# EAGLE board power_layout (EAGLE 9.6.2)
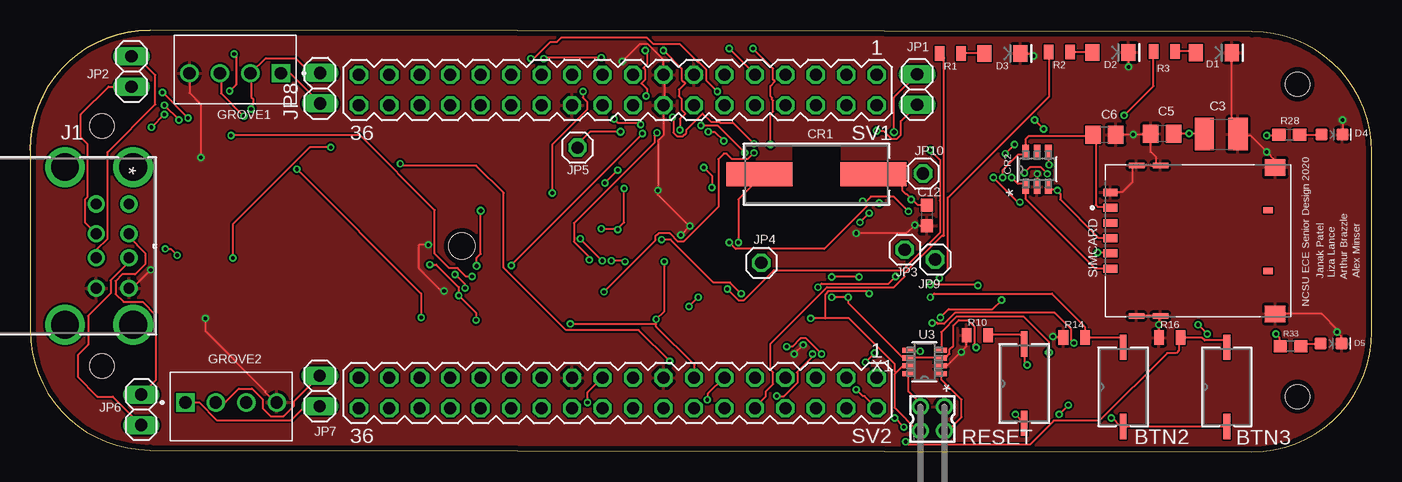
[diagram p0: board, top side]
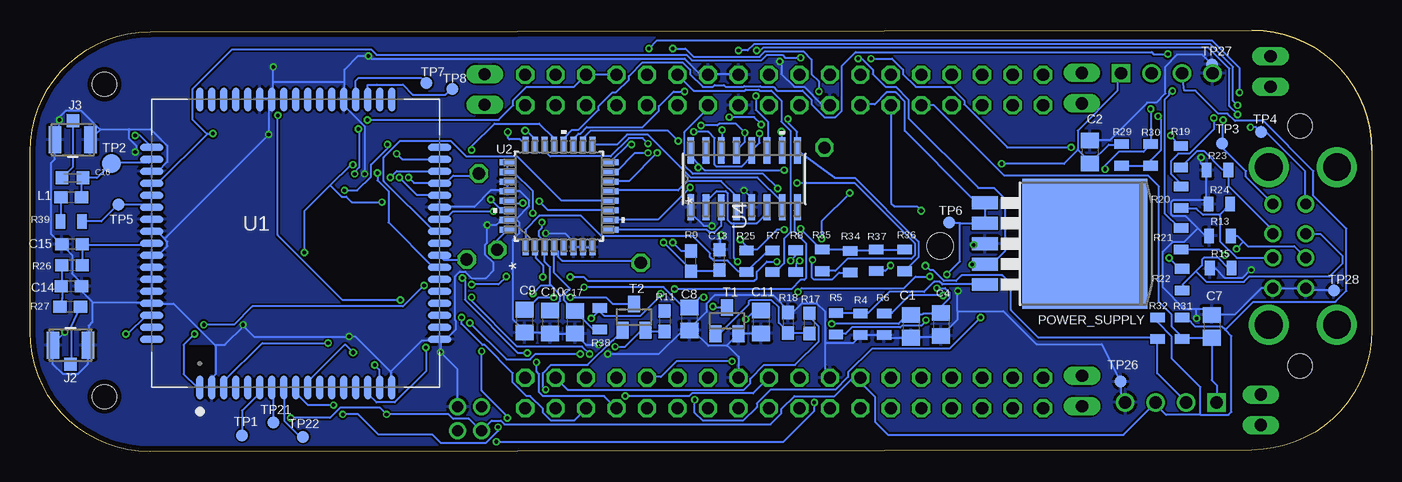
[diagram p1: board, bottom side, seen from below]

Size 111.87 x 35.15 mm. Coordinates in mm from the lower left corner, seen from the top.
Outline: 0,25.15 arc-90 10,35.15
Outline: 0,25.15 0,10.15 arc90 10,0.15 101.87,0 arc90 111.87,10 111.87,25 arc90 101.87,35 10,35.15
Outline: 10,35.15 arc90 0,25.15
Copper layers (1*16): Top 0.035mm / dielectric 1.5mm / Bottom 0.035mm
Design rules "NOA Eagle Rule 2016-06-12": minimum track width 6mil, minimum drill 0.3mm, track to track 6mil, track to pad 6mil, pad to pad 6mil, via to via 6mil, smd to smd 0mil, copper to edge 0.4mm, drill to drill 10mil, minimum pad ring 10mil, minimum via ring 6mil, stop-mask expansion 2mil, vias tented up to drill 25mil, thermal gap 10mil
Net classes: 0 default: width 0.152 mm, drill 0.152 mm, clearance 0.152 mm; 1 POWER: width 0.152 mm, drill 0.152 mm, clearance 0.152 mm
Holes 2 mm at 105.66,4.6 105.66,30.63 6,27.15 6,7.15
Holes 2.2 mm at 36,17.15

## Footprints (pad centres in the part's own frame; a part is rotated, then mirrored left to right if it is on the bottom)
SW2_PTS636_SM25F_SMTR_LFS_CNK = smd 2.108 x 0.559: 1 -3.301,0; 2 3.301,0
C0805 = smd 1.3 x 1.5: 1 -0.95,0; 2 0.95,0
C1210 = smd 1.6 x 2.7: 1 -1.4,0; 2 1.4,0
C0603 = smd 1.1 x 1: 1 -0.85,0; 2 0.85,0
C0603K = smd 1.05 x 1.08: 1 -0.875,0; 2 0.875,0
CRYSTAL_TXC_9C_TXC = smd 5.512 x 2.007: 1 -4.75,0; 2 4.75,0
SOT23-6L_STM-M = smd 1.181 x 0.559: 1 -1.467,0.95; 2 -1.467,0; 3 -1.467,-0.95; 4 1.467,-0.95; 5 1.467,0; 6 1.467,0.95
LED-1206 = smd 1.2 x 1.4: A -1.5,0; C 1.5,0
LED-0603 = smd 1 x 1: A -0.877,0; C 0.877,0
TE_640456-4 = drill 1.02 pad 1.37 square: 1 0,0 | drill 1.02 pad 1.37: 2 -2.54,0; 3 -5.08,0; 4 -7.62,0
CONN_AU-Y1008-2_ASM = drill 0.914 pad 1.422: 1 0,0; 2 2.489,0; 3 4.496,0; 4 7.01,0; 5 0,-2.718; 6 2.489,-2.718; 7 4.496,-2.718; 8 7.01,-2.718 | drill 2.311 pad 2.311: 9 -3.073,-5.334; 10 10.058,-5.334; 11 -3.073,0.356; 12 10.058,0.356
CONN_-SMT-1(01) = smd 1.041 x 2.261: 1 -1.47,0; 2 1.47,0 | smd 1.041 x 1.092: 3 0,-1.596
1X02 = drill 1.016 long: 1 -1.27,0; 2 1.27,0
1X01 = drill 1.016 octagon: 1 0,0
C1608 = smd 1.1 x 1: 1 -0.85,0; 2 0.85,0
TO263-5 = smd 1.067 x 2.159: 1 -3.404,-5.791; 2 -1.702,-5.791; 3 0,-5.791; 4 1.702,-5.791; 5 3.404,-5.791 | smd 10.8 x 10.41: 6 0,2.54
0805 = smd 0.8 x 1.2: 1 -0.9,0; 2 0.9,0
0603 = smd 1.1 x 1: 1 -0.85,0; 2 0.85,0
MOLEX_78646-3001 = smd 1.15 x 0.65: C1 -7.295,2.755; C2 -7.295,0.215; C3 -7.295,-2.325; C5 -7.295,4.025; C6 -7.295,1.485; C7 -7.295,-1.055 | smd 1.3 x 0.45: G1 -5.125,6.27; G2 -3.125,6.27; G3 -5.125,-6.27; G4 -3.125,-6.27 | smd 1.7 x 1.4: G5 6.435,-6.105; G6 6.435,6.105 | smd 0.8 x 0.54: X1 5.855,2.54; X2 5.855,-2.54
MA18-2 = drill 1.016 octagon: 1 -21.59,-1.27; 2 -21.59,1.27; 3 -19.05,-1.27; 4 -19.05,1.27; 5 -16.51,-1.27; 6 -16.51,1.27; 7 -13.97,-1.27; 8 -13.97,1.27; 9 -11.43,-1.27; 10 -11.43,1.27; 11 -8.89,-1.27; 12 -8.89,1.27; 13 -6.35,-1.27; 14 -6.35,1.27; 15 -3.81,-1.27; 16 -3.81,1.27; 17 -1.27,-1.27; 18 -1.27,1.27; 19 1.27,-1.27; 20 1.27,1.27; 21 3.81,-1.27; 22 3.81,1.27; 23 6.35,-1.27; 24 6.35,1.27; 25 8.89,-1.27; 26 8.89,1.27; 27 11.43,-1.27; 28 11.43,1.27; 29 13.97,-1.27; 30 13.97,1.27; 31 16.51,-1.27; 32 16.51,1.27; 33 19.05,-1.27; 34 19.05,1.27; 35 21.59,-1.27; 36 21.59,1.27
SOT23 = smd 1 x 1.4: 1 -0.95,-1.1; 2 0.95,-1.1; 3 0,1.1
TP10R = smd 1 x 1: TP 0,0
TP16R = smd 1.6 x 1.6: TP 0,0
SIMCON_SIM7000E = smd 2 x 0.6: 1 -12,8; 2 -12,7; 3 -12,6; 4 -12,5; 5 -12,4; 6 -12,3; 7 -12,2; 8 -12,1; 9 -12,0; 10 -12,-1; 11 -12,-2; 12 -12,-3; 13 -12,-4; 14 -12,-5; 15 -12,-6; 16 -12,-7; 17 -12,-8; 35 12,-8; 36 12,-7; 37 12,-6; 38 12,-5; 39 12,-4; 40 12,-3; 41 12,-2; 42 12,-1; 43 12,0; 44 12,1; 45 12,2; 46 12,3; 47 12,4; 48 12,5; 49 12,6; 50 12,7; 51 12,8 | smd 0.6 x 2: 18 -8,-12; 19 -7,-12; 20 -6,-12; 21 -5,-12; 22 -4,-12; 23 -3,-12; 24 -2,-12; 25 -1,-12; 26 0,-12; 27 1,-12; 28 2,-12; 29 3,-12; 30 4,-12; 31 5,-12; 32 6,-12; 33 7,-12; 34 8,-12; 52 8,12; 53 7,12; 54 6,12; 55 5,12; 56 4,12; 57 3,12; 58 2,12; 59 1,12; 60 0,12; 61 -1,12; 62 -2,12; 63 -3,12; 64 -4,12; 65 -5,12; 66 -6,12; 67 -7,12; 68 -8,12
VF32_TEX = smd 1.359 x 0.508: 1 -4.274,2.8; 2 -4.274,2; 3 -4.274,1.2; 4 -4.274,0.4; 5 -4.274,-0.4; 6 -4.274,-1.2; 7 -4.274,-2; 8 -4.274,-2.8; 17 4.274,-2.8; 18 4.274,-2; 19 4.274,-1.2; 20 4.274,-0.4; 21 4.274,0.4; 22 4.274,1.2; 23 4.274,2; 24 4.274,2.8 | smd 0.508 x 1.359: 9 -2.8,-4.274; 10 -2,-4.274; 11 -1.2,-4.274; 12 -0.4,-4.274; 13 0.4,-4.274; 14 1.2,-4.274; 15 2,-4.274; 16 2.8,-4.274; 25 2.8,4.274; 26 2,4.274; 27 1.2,4.274; 28 0.4,4.274; 29 -0.4,4.274; 30 -1.2,4.274; 31 -2,4.274; 32 -2.8,4.274
21-0078H = smd 0.978 x 0.432: 1 -1.365,0.975; 2 -1.365,0.325; 3 -1.365,-0.325; 4 -1.365,-0.975; 5 1.365,-0.975; 6 1.365,-0.325; 7 1.365,0.325; 8 1.365,0.975
D16_TEX = smd 2.184 x 0.559: 1 -2.362,4.445; 2 -2.362,3.175; 3 -2.362,1.905; 4 -2.362,0.635; 5 -2.362,-0.635; 6 -2.362,-1.905; 7 -2.362,-3.175; 8 -2.362,-4.445; 9 2.362,-4.445; 10 2.362,-3.175; 11 2.362,-1.905; 12 2.362,-0.635; 13 2.362,0.635; 14 2.362,1.905; 15 2.362,3.175; 16 2.362,4.445
332-04 = drill 0.9 pad 1.27: 1 -1,-1; 2 -1,1; 3 1,-1; 4 1,1

## Placement (x,y rotation side)
BTN2  PTS636SM25F  [SW2_PTS636_SM25F_SMTR_LFS_CNK]  91.14,5.41 90 top
BTN3  PTS636SM25F  [SW2_PTS636_SM25F_SMTR_LFS_CNK]  99.77,5.41 90 top
C1  100uF  [C0805]  38.44,10.46 270 bottom
C2  0.1uF  [C0805]  23.52,24.99 270 bottom
C3  330uF  [C1210]  99.31,26.48 0 top
C4  1uF  [C0805]  35.92,10.61 270 bottom
C5  100nF  [C0805]  94.37,26.5 180 top
C6  .1uF  [C0805]  89.56,26.44 0 top
C7  0.1uF  [C0805]  13.36,10.46 270 bottom
C8  .1uF  [C0805]  56.91,11.07 270 bottom
C9  .1uF  [C0805]  70.64,10.89 270 bottom
C10  .1uF  [C0805]  68.5,10.81 270 bottom
C11  .1uF  [C0805]  50.92,10.82 270 bottom
C12  27pF  [C0603]  74.75,19.69 270 top
C13  27pF  [C0603]  54.38,16 90 bottom
C14  27pF  [C0603]  108.43,13.81 0 bottom
C15  27pF  [C0603]  108.36,17.3 180 bottom
C16  33pF  [C0603K]  108.33,22.83 0 bottom
C17  3uF  [C0805]  66.45,10.79 270 bottom
CR1  9C-6.000MAAJ-T  [CRYSTAL_TXC_9C_TXC]  65.56,23.13 180 top
CR2  ESDA6V1-5SC6SOT23-6L_STM-M  [SOT23-6L_STM-M]  83.95,23.55 90 top
D1  RED  [LED-1206]  98.69,33.26 0 top
D2  GREEN  [LED-1206]  90.06,33.28 0 top
D3  BLUE  [LED-1206]  81.06,33.2 0 top
D4  Yellow  [LED-0603]  108.53,26.44 0 top
D5  Yellow  [LED-0603]  108.46,9.02 0 top
GROVE1  640456-4  [TE_640456-4]  20.91,31.54 0 top
GROVE2  640456-4  [TE_640456-4]  12.95,4.11 180 top
J1  AU-Y1008-2  [CONN_AU-Y1008-2_ASM]  8.25,20.65 270 top
J2  U.FL-R-SMT-1(01)  [CONN_-SMT-1(01)]  108.5,8.89 0.1 bottom
J3  U.FL-R-SMT-1(01)  [CONN_-SMT-1(01)]  108.31,26.01 179.8 bottom
JP1  [1X02]  73.96,30.2 90 top
JP2  [1X02]  8.46,31.7 90 top
JP3  [1X01]  72.92,16.84 0 top
JP4  [1X01]  60.96,15.75 0 top
JP5  [1X01]  45.64,25.35 0 top
JP6  [1X02]  9.27,3.51 270 top
JP7  [1X02]  24.16,5.08 90 top
JP8  [1X02]  24.18,30.3 90 top
JP9  [1X01]  75.46,16.03 0 top
JP10  [1X01]  74.45,23.19 0 top
L1  47nH  [C1608]  108.43,21.23 0 bottom
POWER_SUPPLY  MIC29302WU  [TO263-5]  26.47,17.34 270 bottom
R1  60.4  [0805]  76.73,33.2 180 top
R2  180  [0805]  85.82,33.31 180 top
R3  180  [0805]  94.57,33.37 180 top
R4  47k  [0805]  42.64,10.63 90 bottom
R5  100k  [0805]  44.68,10.67 270 bottom
R6  470k  [0805]  40.68,10.63 90 bottom
R7  27  [0805]  49.98,15.87 90 bottom
R8  27  [0805]  48.04,15.9 90 bottom
R9  1.5k  [0603]  56.79,15.89 90 bottom
R10  4700  [0805]  78.97,9.71 0 top
R11  47k  [0603]  58.97,10.89 270 bottom
R13  15k  [0805]  12.67,18 0 bottom
R14  4700  [0805]  87.04,9.54 0 top
R15  15k  [0805]  12.62,15.31 0 bottom
R16  4700  [0805]  95.02,9.53 0 top
R17  4.7k  [0603]  46.9,10.7 90 bottom
R18  47k  [0603]  48.68,10.76 270 bottom
R19  27  [0805]  15.93,24.59 90 bottom
R20  27  [0805]  15.9,21.21 90 bottom
R21  27  [0805]  15.9,17.76 270 bottom
R22  27  [0805]  15.83,14.35 270 bottom
R23  15k  [0805]  12.87,23.48 0 bottom
R24  15k  [0805]  12.72,20.64 0 bottom
R25  1.5k  [0805]  52.14,15.87 90 bottom
R26  0  [0603]  108.37,15.55 0 bottom
R27  0  [0603]  108.52,12.07 180 bottom
R28  330  [0603]  104.98,26.42 180 top
R29  4700  [0805]  20.88,24.74 270 bottom
R30  4700  [0805]  18.44,24.74 270 bottom
R31  4700  [0805]  15.82,10.29 90 bottom
R32  4700  [0805]  17.88,10.29 90 bottom
R33  330  [0603]  105.08,8.81 180 top
R34  15k  [0805]  43.48,15.85 90 bottom
R35  15k  [0805]  45.82,15.95 90 bottom
R36  15k  [0805]  38.96,15.95 270 bottom
R37  15k  [0805]  41.33,15.98 270 bottom
R38  45k  [0805]  64.36,11.1 270 bottom
R39  10  [0805]  108.43,19.2 0 bottom
RESET  PTS636SM25F  [SW2_PTS636_SM25F_SMTR_LFS_CNK]  82.88,5.69 90 top
SIMCARD  78646-3001  [MOLEX_78646-3001]  97.36,17.59 0 top
SV1  [MA18-2]  49,30.15 180 top
SV2  [MA18-2]  49,4.9 180 top
T1  BCX70SMD  [SOT23]  53.77,10.93 0 bottom
T2  BCX70SMD  [SOT23]  61.52,11.23 0 bottom
TP1  TPTP10R  [TP10R]  94.2,1.37 0 bottom
TP2  TPTP16R  [TP16R]  105.07,24.04 0 bottom
TP3  TPTP10R  [TP10R]  12.5,25.7 0 bottom
TP4  TPTP10R  [TP10R]  9.25,26.67 0 bottom
TP5  TPTP10R  [TP10R]  104.5,20.6 0 bottom
TP6  TPTP10R  [TP10R]  35.26,19.1 0 bottom
TP7  TPTP10R  [TP10R]  78.82,30.73 0 bottom
TP8  TPTP10R  [TP10R]  76.68,30.25 0 bottom
TP21  TPTP10R  [TP10R]  91.59,2.44 0 bottom
TP22  TPTP10R  [TP10R]  89.1,1.24 0 bottom
TP26  TPTP10R  [TP10R]  20.95,5.84 0 bottom
TP27  TPTP10R  [TP10R]  13.34,32.28 0 bottom
TP28  TPTP10R  [TP10R]  3.17,13.44 0 bottom
U1  SIM7000E  [SIMCON_SIM7000E]  89.72,17.36 90 bottom
U2  TUSB2046BVFR  [VF32_TEX]  67.77,21.32 90 bottom
U3  MAX3373EEKA+T  [21-0078H]  74.57,7.49 180 top
U4  TPS2044BDR  [D16_TEX]  52.34,22.74 90 bottom
X1  332-04  [332-04]  75.23,2.75 0 top

## Library data of the parts
BTN2 BTN3 RESET = Personal
C1-C17 L1 = rcl; SPICEPREFIX: C
CR1 = Personal; BUILT_BY: EMA_UL_Team; MANUFACTURER_PART_NUMBER: 9C-6.000MAAJ-T; SOURCELIBRARY: TXC_2011-01-01_CRYSTAL_9C; VENDOR: TXC
CR2 = Personal; BUILT_BY: EMA_UL_Team; MANUFACTURER_PART_NUMBER: ESDA6V1-5SC6; SOURCELIBRARY: Update_database_2020-10-15; VENDOR: STMicroelectronics
D1 = SparkFun-LED; PROD_ID: DIO-09912
D2 = SparkFun-LED; PROD_ID: DIO-00862
D3 = SparkFun-LED; PROD_ID: DIO-09911
D4 D5 = SparkFun-LED; PROD_ID: DIO-09003
GROVE1 GROVE2 = 640456-4; CENTERLINE_PITCH: 2.54 mm[.1 in]; COMMENT: 640456-4; DESCRIPTION: Header, Friction Lock; MTA-100; 4; 250 VAC; Polyester; Tin; Copper Alloy; Tin; DIGI-KEY_PART_NUMBER: A1922-ND; DIGI-KEY_PURCHASE_URL: https://www.digikey.com/product-detail/en/te-connectivity-amp-connectors/640456-4/A1922-ND/109006?utm_source=snapeda&utm_medium=aggregator&utm_campaign=symbol; EU_ROHS_COMPLIANCE: Compliant; MF: TE Connectivity; MP: 640456-4; NUMBER_OF_POSITIONS: 4; PACKAGE: None; PRODUCT_TYPE: Connector; TE_PURCHASE_URL: https://www.te.com/usa-en/product-640456-4.html?te_bu=Cor&te_type=disp&te_campaign=seda_glo_cor-seda-global-disp-prtnr-fy19-seda-model-bom-cta_sma-317_1&elqCampaignId=32493
J1 = Personal; BUILT_BY: EMA_Cory; COPYRIGHT: Copyright (C) 2018 Accelerated Designs. All rights reserved; DATASHEET: http://www.assmann-wsw.com/fileadmin/datasheets/ASS_5780_CO.pdf; MANUFACTURER_PART_NUMBER: AU-Y1008-2; SOURCELIBRARY: Assmann_2020-03-30; VENDOR: Assmann
J2 J3 = Personal; BUILT_BY: EMA_Matt; COPYRIGHT: Copyright (C) 2018 Accelerated Designs. All rights reserved; MANUFACTURER_PART_NUMBER: U.FL-R-SMT-1(01); SOURCELIBRARY: Hirose_12_20_2019; VENDOR: Hirose
JP1-JP10 = pinhead
POWER_SUPPLY = MIC29302WU; AVAILABILITY: Unavailable; DESCRIPTION: Linear Voltage Regulator IC 1 Output 3A TO-263-5; MF: Microchip Technology; MP: MIC29302WU; PACKAGE: TO-263-6 Microchip Technology; PRICE: None
R1-R8 R10 R13-R16 R19-R25 R29-R32 R34-R39 = SparkFun-Resistors
R9 R26-R28 R33 = SparkFun-Resistors; PROD_ID: RES-07856
R11 R18 = SparkFun-Resistors; PROD_ID: RES-07871
R17 = SparkFun-Resistors; PROD_ID: RES-07857
SIMCARD = 78646-3001; AVAILABILITY: Unavailable; DESCRIPTION: 6 Position Card Connector Micro SIM Surface Mount, Right Angle Gold; MF: Molex; MP: 78646-3001; PACKAGE: None; PRICE: None
SV1 SV2 = con-lstb; OC_FARNELL: unknown; OC_NEWARK: unknown
T1 T2 = transistor
TP1-TP8 TP21 TP22 TP26-TP28 = testpad
U1 = SIM7000E; AVAILABILITY: Unavailable; DESCRIPTION: SIM7000E GSM/GPRS RF Arduino Platform Evaluation Expansion Board; MF: DFRobot; MP: SIM7000E; PACKAGE: Package Analog Devices; PRICE: None
U2 = Personal; BUILT_BY: EMA_UL_Team; COPYRIGHT: Copyright (C) 2018 Accelerated Designs. All rights reserved; MANUFACTURER: Texas Instruments; MANUFACTURER_PART_NUMBER: TUSB2046BVFR; SOURCELIBRARY: Texas_Instruments_2018-12-15; VENDOR: Texas Instruments
U3 = Personal; BUILT_BY: EMA_UL_Team; MANUFACTURER_PART_NUMBER: max3373eeka+t; SOURCELIBRARY: Maxim_2009-12-17_3a; VENDOR: Maxim Integrated Products
U4 = Personal; BUILT_BY: EMA_UL_Team; MANUFACTURER: Texas Instruments; MANUFACTURER_PART_NUMBER: TPS2044BDR; SOURCELIBRARY: TI_2014-06-19; VENDOR: Texas Instruments
X1 = con-garry

## Nets
0: R11.1
1.8V: C9.1 T2.3 U1.15 U3.3 U3.6
3.3V [POWER]: BTN2.1 BTN3.1 C10.1 GROVE1.3 GROVE2.3 R25.2 R29.2 R30.2 R31.2 R32.2 R34.2 R35.2 R36.1 R37.1 R38.1 RESET.1 SV1.14 SV2.23 U2.3 U2.25 U2.26 U3.7 X1.1
5V [POWER]: C1.1 C4.1 C11.1 POWER_SUPPLY.1 POWER_SUPPLY.2 SV1.24 SV2.13 TP6.TP U4.2 U4.6
DM0: R8.1 SV1.9
DM4: JP1.1 U2.23
DP0: R7.1 SV1.11
DP4: JP1.2 U2.24
GND: C1.2 C2.1 C3.2 C4.2 C5.2 C6.2 C7.1 C8.2 C9.2 C10.2 C11.2 C12.2 C13.2 C14.2 C15.2 C17.2 CR2.2 D1.C D2.C D3.C D4.C D5.C GROVE1.4 GROVE2.4 J1.4 J1.8 J2.1 J2.2 J3.1 J3.2 POWER_SUPPLY.3 R4.1 R6.1 R10.1 R13.1 R14.1 R15.1 R16.1 R18.1 R23.1 R24.1 SIMCARD.C5 SIMCARD.G1 SIMCARD.G2 SIMCARD.G3 SIMCARD.G4 SIMCARD.G5 SIMCARD.G6 SV1.13 SV1.15 SV1.16 SV1.22 SV2.15 SV2.21 T1.2 TP26.TP TP27.TP TP28.TP U1.2 U1.17 U1.18 U1.29 U1.39 U1.45 U1.46 U1.54 U1.58 U1.59 U1.61 U1.62 U1.63 U1.64 U1.65 U2.6 U2.7 U2.8 U2.27 U2.28 U2.31 U3.2 U4.1 U4.5 X1.4
I2C1_SCL: C2.2 GROVE1.1 JP8.1 R29.1 SV2.9
I2C1_SDA: GROVE1.2 JP8.2 R30.1 SV2.11
I2C2_SCL: C7.2 GROVE2.1 JP7.1 R31.1 SV1.28
I2C2_SDA: GROVE2.2 JP7.2 R32.1 SV1.26
LED1: R3.2 SV2.6
LED2: R2.2 SV2.8
LED3: R1.2 SV2.10
MODEM_D+: U1.27 U2.12
MODEM_D-: U1.28 U2.11
N$1: C6.1 CR2.6 SIMCARD.C1 U1.30
N$2: CR2.3 SIMCARD.C2 U1.33
N$3: POWER_SUPPLY.5 R4.2 R5.1
N$4: CR2.1 SIMCARD.C3 U1.32
N$5: D3.A R1.1
N$7: D2.A R2.1
N$8: D1.A R3.1
N$9: TP1.TP U1.6
N$10: R7.2 R25.1 U2.1
N$11: C14.1 R26.1 R27.2
N$12: R8.2 U2.2
N$13: U3.8 X1.2
N$14: C13.1 CR1.2 R9.1
N$15: C16.1 J3.3
N$16: R22.1 U2.19
N$18: R17.1 R18.2 T1.1
N$19: R19.2 U2.15
N$20: R20.2 U2.16
N$21: TP21.TP U1.7
N$22: R21.1 U2.20
N$23: C8.1 T1.3 U1.1
N$27: L1.1 R39.1
N$29: R28.2 U1.52
N$30: D4.A R28.1
N$32: TP22.TP U1.8
N$33: R33.2 U1.66
N$35: J2.3 R27.1
N$36: R11.2 T2.2 U1.3
N$37: D5.A R33.1
N$38: U3.1 X1.3
NRESET: R10.2 RESET.2 U1.16
OUT1: U4.15
OUT2: J1.1 TP3.TP U4.14
OUT3: J1.5 TP4.TP U4.11
OUT4: JP5.1 U4.10
OVRCUR1: R35.1 U2.10 U4.16
OVRCUR2: R34.1 U2.14 U4.13
OVRCUR3: R37.2 U2.18 U4.12
OVRCUR4: R36.2 U2.22 U4.9
PB2: BTN2.2 R14.2 SV2.17
PB3: BTN3.2 R16.2 SV2.19
PRE_ANT: C15.1 R26.2 U1.60
PRE_GPS: C16.2 L1.2 TP2.TP U1.53
PWRKEY: R17.2 SV2.3
PWRON1: U2.9 U4.3
PWRON2: U2.13 U4.4
PWRON3: U2.17 U4.7
PWRON4: U2.21 U4.8
REGULATED: C3.1 C5.1 POWER_SUPPLY.4 R5.2 R6.2 R39.2 TP5.TP U1.55 U1.56 U1.57
RESET: C17.1 JP4.1 R38.2 U2.4
RXD: U1.10 U3.4
SIM_DATA: CR2.4 JP10.1 SIMCARD.C7 U1.31
SIMC_ADC: JP9.1 U1.25
SIMC_I2C_SCL: TP7.TP U1.38
SIMC_I2C_SDA: TP8.TP U1.37
SLEEP: SV2.2 T2.1
SUSPEND: JP3.1 U2.32
TXD: U1.9 U3.5
USB1_D+: J1.3 JP6.2 R20.1 R24.2
USB1_D-: J1.2 JP6.1 R19.1 R23.2
USB2_D+: J1.7 JP2.2 R13.2 R21.2
USB2_D-: J1.6 JP2.1 R15.2 R22.2
USB_VBUS: SV1.5 SV1.7 U1.24
VPP: SIMCARD.C6
XTAL1: C12.1 CR1.1 U2.30
XTAL2: R9.2 U2.29

## Tracks (layer width: path | path; a pad name or v marks a point on that pad's centre or on a via)
1.8V  (via drill 0.3)
  Top 0.152: v66.83,12.88 v68.2,12.88 68.2,12.42 72.77,7.85 73.15,7.85 U3.6 73.23,7.85 75.89,7.85 U3.3 75.97,7.85 76.35,7.85 76.66,8.15 76.66,8.53 76.96,8.84 76.96,10.52 77.42,10.97 78.18,10.97 78.72,10.44 78.72,8.99 78.64,8.92 v78.87,8.69
  Bottom 0.152: v66.83,12.88 63.86,12.88 63.32,12.34 61.57,12.34 T2.3 | v68.2,12.88 69.49,12.88 70.48,11.89 70.64,11.89 C9.1 | v78.87,8.69 78.87,6.71 81.46,4.11 82.98,4.11 83.67,4.8 83.67,5.33 U1.15
3.3V  (via drill 0.3)
  Top 0.152: v17.83,27.97 15.93,29.87 15.93,31.44 GROVE1.3 | v47.62,18.59 48.92,18.59 v49,18.52 49,18.59 49.53,19.13 v49.53,21.95 | v69.19,19.13 v69.95,19.89 | 72.2,6.59 72.08,6.48 72.08,3.66 73.99,1.75 74.22,1.75 X1.1 | 72.2,6.59 72.77,7.16 73.15,7.16 U3.7 | 66.29,11.13 68.28,11.13 72.08,7.32 72.08,6.71 72.2,6.59 | 66.29,11.13 v65.08,11.13 | v82.14,3.12 82.83,2.44 RESET.1 | 91.14,2.13 90.91,2.13 90.22,2.82 v90.14,2.82 | 91.14,2.13 99.75,2.13 BTN3.1 | 91.14,2.13 BTN2.1 | v69.95,13.18 69.72,13.41 66.6,13.41 66.29,13.11 66.29,11.13 | v52.65,17.68 53.42,17.68 57,14.1 58.37,14.1 v59.28,13.18
  Bottom 0.152: R30.2 R29.2 | R30.2 18.44,24.31 17.6,25.15 17.6,27.74 v17.83,27.97 | R30.2 | 12.23,10.17 11.71,9.65 11.71,3.33 11.96,3.07 14.3,3.07 | 12.23,10.17 12.5,10.44 14.71,10.44 15.39,11.13 15.77,11.13 R31.2 | 14.3,3.07 17.17,3.07 18.03,3.93 GROVE2.3 20.72,1.42 40.34,1.42 41.43,2.51 41.43,4.58 42.6,5.74 42.6,6.17 SV2.23 42.67,6.17 43.28,6.17 44.81,4.65 48.16,4.65 49.23,3.58 49.23,3.2 50.14,2.29 72.31,2.29 72.62,2.59 73.38,2.59 74.22,1.75 X1.1 74.3,1.75 75.29,2.74 76.58,2.74 76.96,3.12 v82.14,3.12 82.68,3.66 86.03,3.66 86.87,2.82 v90.14,2.82 | 14.3,3.07 14.3,5.38 16.69,7.77 16.69,9.6 17.91,10.82 17.91,11.15 R32.2 | 12.23,10.17 9.91,12.5 3.05,12.5 2.13,13.41 2.13,18.59 4.88,21.34 4.88,23.39 9.07,27.58 11.43,27.58 12.04,28.19 12.8,28.19 14.71,30.1 15.63,30.1 GROVE1.3 | R36.1 39.01,16.84 41.3,16.84 R37.1 41.3,16.76 43.43,16.76 R34.2 43.43,16.84 45.8,16.84 R35.2 45.87,16.84 v47.62,18.59 | v49,18.52 49.61,18.52 51.28,16.84 52.12,16.84 R25.2 52.12,16.92 52.12,17.15 v52.65,17.68 | v49.53,21.95 50.75,23.16 56.62,23.16 57.3,23.85 57.3,26.67 55.4,28.58 55.4,28.88 SV1.14 | U2.25 72.08,24.08 72.08,23.32 U2.26 71.55,23.32 69.95,21.72 v69.95,19.89 | 68.47,13.91 67.67,13.11 67.67,12.57 68.43,11.81 C10.1 | 68.47,13.91 68.5,13.94 68.5,15.39 68.96,15.85 68.96,16.99 U2.3 69.04,17.07 69.04,17.6 69.42,17.98 69.42,18.44 69.19,18.67 v69.19,19.13 | v65.08,11.13 64.39,11.81 64.39,11.96 R38.1 64.39,11.73 64.01,11.35 60.96,11.35 59.28,13.03 v59.28,13.18 | v69.95,13.18 69.27,13.87 68.5,13.87 68.47,13.91
5V  (via drill 0.3)
  Top 0.152: 52.2,10.67 52.2,10.44 55.4,7.24 55.4,6.25 SV2.13 | 52.2,10.67 v52.2,11.05 52.88,11.73 v52.88,15.85 | v36.27,13.64 36.27,13.94 v35.43,14.78 | v45.03,10.67 52.2,10.67
  Bottom 0.152: 53.19,19.05 53.42,19.05 53.72,19.35 53.72,21.56 53.87,21.72 54.63,21.72 55.47,20.88 55.47,20.42 U4.2 | 53.19,19.05 51.28,19.05 50.44,19.89 50.44,20.35 U4.6 | v52.2,11.05 51.51,11.73 50.98,11.73 C11.1 | 53.19,19.05 53.19,16.15 v52.88,15.85 | POWER_SUPPLY.2 32.28,19.05 34.34,19.05 | POWER_SUPPLY.2 32.62,19.4 | v36.27,13.64 35.59,13.64 35.2,13.26 35.2,12.8 35.89,12.12 35.89,11.58 C4.1 35.97,11.51 37.41,11.51 37.49,11.43 38.41,11.43 C1.1 38.48,11.35 38.79,11.35 39.47,10.67 v45.03,10.67 | 34.34,19.05 34.34,15.88 v35.43,14.78 | 34.85,19.05 TP6.TP 35.2,19.04 35.19,19.05 34.34,19.05 | SV1.24 42.6,28.96 41.45,28.96 40.46,29.95 39.7,29.95 38.94,29.18 38.94,26.75 33.42,21.22 POWER_SUPPLY.1 POWER_SUPPLY.2
DM0  (via drill 0.3)
  Top 0.152: v45.87,17.75 v47.7,15.93 | v43.54,21.56 43.54,25.6 46.43,28.5 46.43,29.18 46.1,29.51 v46.1,30.02 | v58.29,33.6 60.43,31.47 SV1.9
  Bottom 0.152: v47.7,15.93 48.01,15.62 48.01,15.01 R8.1 | v45.87,17.75 45.87,19.23 v43.54,21.56 | v46.1,30.02 46.1,30.86 46.71,31.47 46.71,32.69 47.4,33.38 50.6,33.38 51.05,32.92 56.54,32.92 57.23,33.6 v58.29,33.6
DM4  (via drill 0.35)
  Top 0.152: v70.59,26.75 71.14,26.75 71.8,26.09 72.27,26.09 72.59,26.41 72.59,27.56 JP1.1
  Bottom 0.152: 69.8,25.6 U2.23 69.78,26.05 70.48,26.75 v70.59,26.75
DP0
  Bottom 0.152: R7.1 49.91,15.01 49.68,15.01 49,15.7 49,17.75 48.46,18.29 48.46,26.75 49.23,27.51 49.23,29.26 50.06,30.1 51.05,30.1 51.13,30.18 52.2,30.18 52.27,30.1 56.54,30.1 57.84,31.39 SV1.11
DP4  (via drill 0.35)
  Top 0.152: v72.03,26.64 72.03,29.54 JP1.2
  Bottom 0.152: 70.64,25.53 U2.24 71.02,26.04 71.93,26.04 72.03,26.14 v72.03,26.64
GND  (via drill 0.3)
  Top 0.152: v10.06,15.16 8.61,13.72 8.31,13.72 J1.4 | v14.25,24.54 14.25,28.96 13.29,29.91 GROVE1.4 | v33.2,17.25 32.44,17.25 32.44,15.27 34.29,13.41 v34.52,13.41 | v14.63,11.13 14.63,10.03 19.61,5.05 19.61,4.98 20.45,4.14 20.75,4.14 GROVE2.4 | D1.C 100.2,33.22 100.2,26.97 100.66,26.52 C3.2 100.74,26.44 101.42,26.44 101.5,26.37 101.73,26.37 v103.1,24.99 103.78,24.31 103.78,23.7 SIMCARD.G6 | v109.42,27.66 109.42,26.44 D4.C | D5.C 109.27,9.07 109.27,9.68 v108.97,9.98 109.04,9.98 109.12,10.06 107.67,11.51 103.86,11.51 SIMCARD.G5 | v54.25,18.06 v55.02,18.82 54.94,18.82 52.35,21.41 v52.35,21.79 52.35,25.91 52.81,26.37 SV1.16 52.88,28.96 52.88,31.39 SV1.15 52.81,31.47 52.81,32.69 51.51,33.99 50.83,33.99 v49.38,32.54 | C12.2 74.68,18.9 v73.76,18.9 73.08,18.21 v68.89,18.21 | 93.42,26.44 v91.97,26.44 C6.2 | SIMCARD.C5 90.14,21.64 91.06,21.64 91.9,22.48 91.9,23.7 92.05,23.85 92.2,23.85 SIMCARD.G1 92.2,23.77 92.89,23.77 93.04,23.93 93.42,23.93 93.5,23.85 93.88,23.85 | 93.88,23.85 94.18,23.85 SIMCARD.G2 93.88,23.85 | 93.42,26.44 93.42,24.99 93.88,24.54 93.88,23.85 | 93.42,26.44 C5.2 | v91.59,32.08 91.59,33.22 D2.C | v83.97,23.16 83.97,22.1 CR2.2 | v83.67,32.99 83.52,33.15 82.6,33.15 D3.C | 77.61,8.34 78.03,8.76 78.03,9.68 R10.1 | 77.61,8.34 76.5,7.24 75.97,7.24 U3.2 | v85.27,9.6 86.11,9.6 R14.1 | v77.65,8.31 77.61,8.34 | R16.1 94.11,9.6 v94.11,10.59 94.11,11.2 94.18,11.28 SIMCARD.G4 94.18,11.35 92.28,11.35 SIMCARD.G3 | v64.47,8.92 v63.7,8.15
  Bottom 0.152: C2.1 23.47,25.98 21.87,25.98 18.75,29.11 17.98,29.11 17.22,29.87 17.22,32.11 16.2,33.12 14.17,33.12 TP27.TP 13.34,31.58 GROVE1.4 | 14.52,18.63 15.54,19.66 16.61,19.66 16.76,19.81 16.76,20.8 16.61,20.96 13.95,20.96 13.64,20.65 R24.1 13.79,20.88 13.79,23.47 R23.1 13.79,23.55 14.25,24 v14.25,24.54 | 14.52,18.63 13.95,18.06 13.64,18.06 R13.1 | TP28.TP 3.2,13.49 5.33,13.49 5.49,13.64 J1.8 5.56,13.64 8.23,13.64 J1.4 8.31,13.64 9.22,13.64 11.43,11.43 13.34,11.43 C7.1 13.41,11.43 13.87,11.89 14.63,11.89 | v10.06,15.16 10.13,15.16 10.82,14.48 12.27,14.48 13.03,15.24 13.49,15.24 R15.1 | 14.52,18.63 15.62,17.53 16.61,17.53 17.45,16.69 17.45,13.72 15.62,11.89 14.63,11.89 | C11.2 50.98,9.83 52.81,9.83 T1.2 52.88,9.75 53.76,8.88 | 53.76,8.88 53.8,8.84 55.32,8.84 56.54,10.06 56.84,10.06 C8.2 | 53.76,8.88 52.81,7.92 52.81,6.25 SV2.15 | 45.57,9.07 45.57,6.55 45.26,6.25 SV2.21 | 45.57,9.07 45.57,11.66 46.25,12.34 47.55,12.34 48.23,11.66 48.62,11.66 R18.1 48.62,11.73 49.91,13.03 54.79,13.03 55.47,12.34 55.47,11.66 56.46,10.67 56.46,10.06 C8.2 | GROVE2.4 20.83,4.14 20.9,4.22 20.9,5.82 TP26.TP 22.52,8.97 27.96,8.97 30.73,11.73 34.52,11.73 | v33.2,17.25 33.2,17.3 32.28,17.3 POWER_SUPPLY.3 | 34.52,11.73 34.52,11.05 35.89,9.68 C4.2 35.97,9.6 38.48,9.6 C1.2 38.48,9.53 40.46,9.53 40.62,9.68 R6.1 40.69,9.75 42.6,9.75 R4.1 42.67,9.68 43.28,9.07 45.57,9.07 | v34.52,13.41 34.52,13.26 34.59,13.18 34.59,11.73 34.52,11.73 | v14.63,11.13 14.63,11.89 | 103.63,26.9 105.99,26.9 106.03,26.86 | 103.63,26.9 101.8,26.9 100.43,25.53 100.43,24.16 101.19,23.39 101.65,23.39 U1.54
  Bottom 0.152: 106.03,26.86 106.83,26.06 J3.1 | 106.03,26.86 107.59,28.42 108.89,28.42 109.42,27.89 v109.42,27.66 109.42,26.37 109.73,26.06 J3.2 109.8,25.98 109.8,24.38 110.11,24.08 110.11,18.14 109.44,17.46 C15.2 108.92,16.95 108.36,16.38 108.36,14.86 107.59,14.1 107.59,13.82 C14.2 107.49,13.31 106.68,12.5 106.68,12.42 | v108.97,9.98 110.03,8.92 J2.1 109.96,8.84 109.96,7.32 109.12,6.48 107.9,6.48 107.06,7.32 107.06,8.84 J2.2 106.98,8.92 106.98,10.52 106.68,10.82 106.68,12.42 | v103.1,24.99 103.02,24.99 103.02,25.53 103.63,26.14 103.63,26.9 | v54.25,18.06 54.33,17.98 54.33,16.92 C13.2 | v55.02,18.82 55.7,18.82 56.77,19.89 56.77,20.35 U4.1 | v52.35,21.79 51.74,21.18 51.74,20.42 U4.5 | v49.38,32.54 49.23,32.39 49.23,31.47 48.16,30.4 47.32,30.4 45.87,28.96 45.26,28.96 SV1.22 | SV1.15 52.88,31.47 55.32,31.47 SV1.13 55.4,31.47 56.01,31.47 57.3,32.77 83.44,32.77 v83.67,32.99 84.51,32.99 85.65,31.85 85.65,30.78 | 66.45,9.83 68.43,9.83 C10.2 68.5,9.91 70.64,9.91 C9.2 70.71,9.98 70.71,10.13 71.63,11.05 71.63,17.68 71.09,18.21 71.09,19.13 71.36,19.39 | U2.8 65,17.07 65.76,17.07 U2.7 65.84,17.07 66.52,17.07 U2.6 66.52,17.15 66.52,17.45 67.28,18.21 v68.89,18.21 | U2.28 72.08,21.79 72.08,22.48 U2.27 | 71.36,19.39 71.4,19.35 72.01,19.35 U2.31 72.08,19.28 72.62,19.28 73,18.9 v73.76,18.9 73.76,17.4 73.91,17.25 73.91,16.43 73.23,15.74 73.23,15.11 73.87,14.48 75.07,14.48 75.6,15.01 76.04,15.01 76.43,14.62 76.43,10.98 76.35,10.91 76.35,10.21 77.27,9.3 77.57,9.3 U1.18 | 71.36,19.39 70.26,20.5 70.26,20.96 71.02,21.72 72.01,21.72 U2.28 | U1.29 77.65,20.42 74.83,20.42 73.46,21.79 72.16,21.79 U2.28
  Bottom 0.152: 91.59,30.78 91.59,29.49 91.67,29.41 U1.45 | 91.59,30.78 v91.59,32.08 | 91.97,29.41 91.75,29.41 U1.45 | 91.97,29.41 92.66,29.41 U1.46 | v83.97,23.16 83.97,27.13 85.65,28.8 85.65,29.34 U1.39 85.65,29.41 85.65,30.78 | 85.65,30.78 91.59,30.78 | 91.97,29.41 v91.97,26.44 100.66,17.75 | 91.97,29.41 U1.45 | 81.8,6.67 81.76,6.63 81.76,5.41 U1.17 | 81.8,6.67 84.73,9.6 v85.27,9.6 93.19,9.6 94.03,10.44 v94.11,10.59 94.03,10.59 94.03,10.52 95.63,8.92 96.39,8.92 96.43,8.88 | 81.8,6.67 79.17,9.3 77.72,9.3 U1.18 | U1.18 77.65,9.3 v77.65,8.31 76.28,6.93 76.28,3.81 X1.4 | U1.58 U1.59 101.65,18.29 101.19,18.29 100.66,17.75 | 96.43,8.88 99.9,12.34 101.65,12.34 U1.65 | 96.43,8.88 96.39,8.84 96.39,6.48 96.7,6.17 96.7,5.41 U1.2 | U1.65 101.73,12.42 101.73,13.34 U1.64 101.73,13.41 101.73,14.33 U1.63 101.73,14.4 101.73,15.32 U1.62 101.73,15.39 101.73,16.31 U1.61 101.65,16.38 101.19,16.38 100.43,17.15 100.43,17.53 100.66,17.75 | 106.68,12.42 101.8,12.42 U1.65 | v63.7,8.15 59.44,8.15 57.53,10.06 56.92,10.06 C8.2 | v64.47,8.92 65.53,8.92 66.45,9.83 | 66.45,9.83 C17.2
  pour Bottom: -5.03,36.94 113.68,36.94 113.68,-1.24 -5.03,-1.24 -5.03,36.94 -5.03,36.94
  pour Top: -4.29,36.98 114.17,36.98 114.17,-4.8 -4.29,-4.8
I2C1_SCL  (via drill 0.3)
  Top 0.152: v53.34,7.54 50.75,10.13 44.7,10.13 39.48,15.36 39.48,21.57 37.21,23.85 30.86,23.85 v30.86,24 | GROVE1.1 21.67,31.54 JP8.1
  Bottom 0.152: R29.1 20.88,25.6 21.95,25.6 23.47,24.08 C2.2 23.47,24.16 24.5,25.18 | 24.5,25.18 24.54,25.22 24.54,26.77 21.24,30.07 21.24,31.22 GROVE1.1 | v53.34,7.54 57.99,7.54 59.28,6.25 60.43,6.25 SV2.9 | v30.86,24 25.68,24 24.5,25.18
I2C1_SDA  (via drill 0.3)
  Top 0.152: v18.44,28.58 18.44,28.8 18.59,28.96 18.59,29.41 18.44,29.57 18.44,31.42 GROVE1.2 19.65,32.82 22.13,32.82 23.38,31.57 JP8.2 | v56.46,4.34 56.54,4.42 56.54,4.88 57.84,6.17 SV2.11 | v32.61,11.2 32.61,13.18 v22.25,23.55
  Bottom 0.152: v18.44,28.58 R30.1 18.44,25.6 19.05,24.99 21.11,24.99 22.25,23.85 v22.25,23.55 | v56.46,4.34 56.46,3.28 55.78,2.59 52.43,2.59 51.28,3.73 51.28,4.04 50.14,5.18 44.73,5.18 43.66,6.25 43.66,6.63 41.68,8.61 35.2,8.61 v32.61,11.2
I2C2_SCL
  Top 0.152: GROVE2.1 14.08,4.11 15.56,2.63 21.77,2.63 22.94,3.81 JP7.1
  Bottom 0.152: SV1.28 36.5,28.88 30.63,23.01 18.64,23.01 17.75,22.12 17.75,12.5 16.69,11.43 16.69,10.44 15.77,9.53 R31.1 15.77,9.45 13.41,9.45 C7.2 13.36,9.5 13.36,5.97 12.95,5.56 GROVE2.1
I2C2_SDA  (via drill 0.35)
  Top 0.152: GROVE2.2 16.27,4.11 17.41,5.26 18.52,5.26 19.4,4.38 19.4,3.62 20.06,2.97 21.13,2.97 22.02,3.85 22.02,4.21 JP7.2 | v37.24,15.49 37.24,16.16 37.58,16.5 v37.58,20.1
  Bottom 0.152: SV1.26 40.08,28.88 40.08,20.73 39.8,20.45 37.92,20.45 v37.58,20.1 | GROVE2.2 17.91,6.53 17.91,9.32 R32.1 18.52,9.53 27.81,9.53 30.1,11.81 30.1,14 30.81,14.71 34.21,14.71 34.67,14.25 35.69,14.25 36.57,15.14 36.83,15.14 37.19,15.49 v37.24,15.49
LED1  (via drill 0.3)
  Top 0.152: v91.21,28.04 93.65,30.48 93.65,33.3 R3.2 | v81,12.65 80.24,11.89 76.58,11.89 v75.89,11.2
  Bottom 0.152: v91.21,28.04 91.21,18.06 85.8,12.65 v81,12.65 | v75.89,11.2 75.89,10.67 74.14,8.92 73.99,8.92 71.63,6.55 71.63,5.79 70.48,4.65 70.18,4.65 69.11,3.58 69.11,3.28 68.43,2.59 66.52,2.59 65.53,3.58 SV2.6
LED2  (via drill 0.3)
  Top 0.152: v75.82,14.48 76.5,15.16 76.5,21.18 84.96,29.64 84.96,33.3 R2.2 | v69.65,7.47 v70.41,8.23
  Bottom 0.152: v75.82,14.48 75.62,14.27 75.62,12.67 71.17,8.23 v70.41,8.23 | v69.65,7.47 69.65,6.71 69.42,6.48 69.42,4.95 69.11,4.65 64.01,4.65 63.02,3.66 SV2.8
LED3
  Top 0.152: R1.2 76.2,32.82 76.2,18.01 76.02,18.01 72.9,14.89 72.9,14.59 72.02,13.72 66.45,13.72 61.72,8.99 61.72,6.86 61.95,6.63 61.95,5.64 61.34,5.03 61.34,4.65 60.5,3.81 60.5,3.66 SV2.10
MODEM_D+
  Bottom 0.152: U2.12 63.55,20.96 67.59,20.96 71.25,24.61 75.51,24.61 76.81,25.91 81,25.91 82.37,24.54 82.37,22.56 78.18,18.36 U1.27
MODEM_D-  (via drill 0.3)
  Top 0.152: v69.42,20.88 69.72,20.88 70.1,21.26 72.01,21.26 v73.23,20.04
  Bottom 0.152: v69.42,20.88 68.73,20.19 63.55,20.19 U2.11 | v73.23,20.04 76.58,20.04 77.19,19.43 77.65,19.43 U1.28
N$1  (via drill 0.3)
  Top 0.152: SIMCARD.C1 90.07,20.42 89,20.42 88.85,20.57 88.85,26.21 C6.1 88.54,26.44 88.39,26.29 83.21,26.29 82.98,26.06 82.98,25.07 CR2.6 82.98,24.99 82.75,24.77 82.37,24.77 81.08,23.47 v81.08,22.86
  Bottom 0.152: v81.08,22.86 79.63,21.41 77.72,21.41 U1.30
N$2  (via drill 0.3)
  Top 0.152: 85.61,21.76 85.5,21.87 85.11,21.87 84.96,22.02 CR2.3 | 85.61,21.76 85.88,21.49 85.88,21.03 89.08,17.83 90.07,17.83 SIMCARD.C2 | v82.07,25.6 v81.31,24.84 | v85.65,21.79 85.61,21.76
  Bottom 0.152: v81.31,24.84 80.85,24.38 77.72,24.38 U1.33 | v82.07,25.6 82.07,25.3 83.44,23.93 83.44,22.94 84.58,21.79 v85.65,21.79
N$3
  Bottom 0.152: R5.1 44.65,11.58 42.67,11.58 R4.2 42.6,11.58 41.99,11.58 40.23,13.34 37.34,13.34 36.5,14.17 36.04,14.17 35.81,13.94 32.28,13.94 POWER_SUPPLY.5
N$4  (via drill 0.3)
  Top 0.152: SIMCARD.C3 90.07,15.32 88.77,15.32 82.98,21.11 82.98,22.02 CR2.1 82.98,22.1 82.75,22.33 82.37,22.33 v81.84,22.86
  Bottom 0.152: v81.84,22.86 81.31,23.39 77.72,23.39 U1.32
N$5
  Top 0.152: R1.1 77.65,33.22 79.55,33.22 D3.A
N$7
  Top 0.152: R2.1 86.72,33.3 88.54,33.3 D2.A
N$8
  Top 0.152: R3.1 97.08,33.38 97.16,33.3 D1.A
N$9
  Bottom 0.152: TP1.TP 94.18,1.37 94.18,3.43 92.73,4.88 92.73,5.33 U1.6
N$10
  Bottom 0.152: R7.2 50.37,16.76 52.12,15.01 R25.1 52.2,15.01 52.81,15.01 53.72,15.93 54.86,15.93 55.17,16.23 55.17,16.54 56.62,17.98 64.24,17.98 65.91,19.66 69.42,19.66 70.56,18.52 70.56,17.07 U2.1
N$11
  Bottom 0.152: R27.2 109.19,12.84 109.19,13.69 C14.1 109.19,13.89 109.19,15.2 R26.1
N$12  (via drill 0.3)
  Top 0.152: v48.46,15.93 49.53,15.93 v49.61,15.85 | v69.11,14.58 v66.83,14.58
  Bottom 0.152: v48.46,15.93 48.08,16.31 48.08,16.76 R8.2 | v49.61,15.85 50.44,15.85 51.28,15.01 51.28,14.48 51.51,14.25 65.38,14.25 65.71,14.58 v66.83,14.58 | v69.11,14.58 69.11,15.54 69.72,16.15 69.72,16.99 U2.2
N$13
  Top 0.152: U3.8 73.23,6.48 73.23,5.03 74.22,4.04 74.22,3.81 X1.2
N$14  (via drill 0.3)
  Top 0.152: v59.05,17.45 59.05,21.03 60.81,22.78 60.81,23.09 CR1.2
  Bottom 0.152: C13.1 54.41,15.09 56.77,15.09 R9.1 56.77,15.16 v59.05,17.45
N$15
  Bottom 0.152: J3.3 108.28,27.58 108.28,23.76 C16.1
N$16  (via drill 0.3)
  Top 0.152: v16.92,16.15 16.92,18.97 23.32,25.37 v25.07,25.37 | v41.76,32.77 41.99,32.77 43.36,34.14 43.89,34.14 44.27,34.52 51.44,34.52 51.97,33.99 54.18,33.99 55.7,32.46 55.78,32.46 56.39,31.85 56.39,30.94 v57.3,30.02
  Bottom 0.152: v16.92,16.15 16.08,15.32 15.85,15.32 R22.1 | v25.07,25.37 30.4,25.37 33.98,28.96 33.98,29.26 35.13,30.4 38.02,30.4 39.09,31.47 39.09,31.85 40.01,32.77 v41.76,32.77 | v57.3,30.02 58.22,30.02 59.44,28.8 59.44,28.42 60.81,27.05 65.46,27.05 65.99,26.52 66.14,26.52 66.52,26.14 66.52,25.6 U2.19
N$18
  Bottom 0.152: R17.1 46.94,9.91 48.62,9.91 R18.2 48.69,9.98 49.45,10.74 49.45,12.04 50.06,12.65 51.82,12.65 51.97,12.5 51.97,12.27 54.41,9.83 T1.1
N$19  (via drill 0.3)
  Top 0.152: v47.85,13.34 52.12,17.6 52.12,17.91 52.43,18.21 53.34,18.21 54.03,17.53 54.48,17.53 57.38,20.42 57.38,24.38 57.84,24.84 58.06,24.84 58.52,24.38 59.82,24.38 v60.35,24.92 | v36.85,14.61 36.36,14.61 35.65,15.31 34.93,15.31 33.73,16.51 33.73,20.14 27.51,26.37 v16.76,26.37
  Bottom 0.152: v16.76,26.37 16.76,26.29 16,25.53 R19.2 | v36.85,14.61 38.05,14.61 39.01,13.64 47.55,13.64 v47.85,13.34 | v60.35,24.92 61.42,24.92 63.02,23.32 U2.15
N$20  (via drill 0.3)
  Top 0.152: v11.05,29.95 v13.18,27.81 | v60.27,33.6 61.95,31.93 61.95,31.01 62.1,30.86 61.72,30.48 61.72,29.64 61.87,29.49 61.87,29.34 61.95,29.26 61.95,28.35 61.72,28.12 v61.72,25.6
  Bottom 0.152: v13.18,27.81 13.18,26.9 15.24,24.84 16.15,24.84 16.76,24.23 16.76,23.16 15.93,22.33 15.93,22.17 R20.2 | v11.05,29.95 11.05,32 13.34,34.29 59.59,34.29 v60.27,33.6 | v61.72,25.6 62.03,25.6 63.48,24.16 U2.16
N$21
  Bottom 0.152: TP21.TP 91.59,5.26 91.67,5.33 U1.7
N$22  (via drill 0.3)
  Top 0.152: v17.02,33.15 17.17,32.99 17.17,30.61 v16.64,30.07
  Bottom 0.152: v16.64,30.07 16.92,30.07 16.92,29.72 17.3,29.34 17.3,19.89 16.08,18.67 15.93,18.67 R21.1 | v17.02,33.15 18.21,33.15 18.36,33.3 43.05,33.3 44.2,32.16 44.2,28.42 44.73,27.89 45.64,27.89 46.71,28.96 46.71,29.34 47.47,30.1 49.61,30.1 49.91,30.4 50.9,30.4 50.98,30.48 52.35,30.48 52.43,30.4 53.87,30.4 54.03,30.56 54.79,30.56 54.94,30.4 55.78,30.4 56.84,31.47 56.84,31.85 57.45,32.46 60.81,32.46 61.95,31.32 61.95,31.01 63.02,29.95 63.32,29.95 64.47,28.8 64.47,28.5 66.14,26.82 66.67,26.82 67.36,26.14 67.36,25.6 U2.20
N$23  (via drill 0.3)
  Top 0.152: v55.7,12.88 v54.94,12.12 | v97.38,10.59 v98.15,9.83 | v79.02,13.87 78.94,13.94 v75.06,13.94 | v72.16,14.61 71.58,14.02 65.99,14.02 v65.68,13.72
  Bottom 0.152: v54.94,12.12 54.86,12.04 53.8,12.04 T1.3 | v55.7,12.88 56.01,12.88 56.84,12.04 C8.1 56.92,12.04 57.38,12.04 59.05,13.72 v65.68,13.72 | v98.15,9.83 99.06,8.92 99.06,6.48 97.99,5.41 97.77,5.41 U1.1 | v97.38,10.59 94.87,10.59 93.34,12.12 80.77,12.12 v79.02,13.87 | v75.06,13.94 72.82,13.94 v72.16,14.61
N$27
  Bottom 0.152: L1.1 109.27,21.18 109.27,19.2 R39.1
N$29  (via drill 0.3)
  Top 0.152: v103.1,26.37 104.09,26.37 R28.2
  Bottom 0.152: v103.1,26.37 102.72,26.37 101.73,25.37 U1.52
N$30
  Top 0.152: D4.A 105.84,26.44 R28.1
N$32
  Bottom 0.152: TP22.TP 89.15,1.3 89.38,1.3 90.68,2.59 90.68,5.33 U1.8
N$33  (via drill 0.3)
  Top 0.152: v103.86,9.83 104.17,9.53 104.17,8.84 R33.2
  Bottom 0.152: v103.86,9.83 103.71,9.83 102.18,11.35 U1.66
N$35
  Bottom 0.152: J2.3 108.43,7.32 108.43,10.44 R27.1
N$36  (via drill 0.3)
  Top 0.152: v63.09,8.76 63.55,8.76 64.24,9.45 64.69,9.45 v65.99,8.15 | v75.21,10.74 75.59,10.74 75.67,10.67 76.2,10.67 77.11,11.58 85.42,11.58 86.79,10.21 86.79,9.3 v87.02,9.07
  Bottom 0.152: R11.2 58.98,10.06 60.5,10.06 T2.2 60.58,10.06 60.96,10.06 62.26,8.76 v63.09,8.76 | v65.99,8.15 69.72,8.15 70.18,7.7 72.16,7.7 v75.21,10.74 | v87.02,9.07 92.51,9.07 95.71,5.87 95.71,5.41 U1.3
N$37
  Top 0.152: D5.A 107.52,8.99 106.15,8.99 105.99,8.84 R33.1
N$38
  Top 0.152: U3.1 75.97,6.48 75.97,6.02 77.65,4.34 77.65,2.9 76.5,1.75 76.28,1.75 X1.3
NRESET  (via drill 0.3)
  Top 0.152: R10.2 79.93,9.75 82.6,9.75 82.83,9.53 82.83,8.99 RESET.2 82.91,8.92 82.91,7.47 v83.13,7.24
  Bottom 0.152: v83.13,7.24 82.75,6.86 82.75,5.41 U1.16
OUT2  (via drill 0.3)
  Top 0.152: v54.18,26.82 54.18,27.74 54.63,28.19 54.33,28.5 54.33,29.41 54.1,29.64 54.1,30.18 54.63,30.71 54.33,31.01 54.33,31.93 v52.81,33.45 | v12.42,27.66 v11.2,28.88
  Bottom 0.152: J1.1 8.31,20.73 10.52,22.94 10.52,23.39 12.5,25.37 TP3.TP 12.5,25.76 12.42,25.83 v12.42,27.66 | v54.18,26.82 54.18,25.15 U4.14 | v52.81,33.45 52.05,33.45 51.51,33.99 13.49,33.99 11.58,32.08 11.58,29.26 v11.2,28.88
OUT3  (via drill 0.3)
  Top 0.152: v51.36,29.64 51.44,29.72 51.44,30.25 50.98,30.71 51.28,31.01 51.28,31.85 51.13,32 51.44,32.31 51.44,33.3 v51.28,33.45 | v10.13,27.05 v11.2,28.12
  Bottom 0.152: J1.5 5.56,20.73 5.56,23.39 8.84,26.67 TP4.TP 9.3,26.67 9.68,27.05 v10.13,27.05 | v51.36,29.64 51.36,28.5 50.37,27.51 50.37,25.15 U4.11 | v51.28,33.45 50.98,33.45 50.75,33.68 13.64,33.68 11.89,31.93 11.89,28.8 v11.2,28.12
OUT4  (via drill 0.35)
  Top 0.152: v49.23,26.67 46.69,26.67 45.64,25.63 JP5.1
  Bottom 0.152: U4.10 49.17,26.57 49.15,26.59 v49.23,26.67
OVRCUR1  (via drill 0.3)
  Top 0.152: v49,23.47 v47.93,22.4 | v56.84,22.02 56.84,23.01 v56.16,23.7
  Bottom 0.152: v47.93,22.4 43.13,22.4 38.1,17.37 38.1,16.38 38.41,16.08 43.74,16.08 44.73,15.09 45.8,15.09 R35.1 | v49,23.47 55.63,23.47 56.01,23.85 | 56.01,23.85 56.77,24.61 56.77,25.07 U4.16 | v56.84,22.02 59.51,19.35 63.48,19.35 U2.10 | 56.01,23.85 v56.16,23.7
OVRCUR2  (via drill 0.3)
  Top 0.152: v46.63,16 46.63,16.23 45.34,17.53 45.34,19.05 52.05,25.76 52.05,26.37 v52.27,26.59 | v59.59,24.92 57.3,27.2 v55.93,27.2
  Bottom 0.152: v46.63,16 46.71,15.93 46.71,14.55 46.56,14.4 44.96,14.4 44.42,14.94 43.51,14.94 R34.1 | U4.13 52.96,25.15 52.27,25.83 v52.27,26.59 53.03,27.36 54.41,27.36 54.56,27.2 v55.93,27.2 | v59.59,24.92 61.95,22.56 63.48,22.56 U2.14
OVRCUR3  (via drill 0.3)
  Top 0.152: v40.13,15.52 40.13,15.6 v51.05,26.52 | v57.84,25.91 57.07,26.67 v56.54,26.67
  Bottom 0.152: v40.13,15.52 40.56,15.09 41.3,15.09 R37.2 | v51.05,26.52 51.05,25.76 51.66,25.15 U4.12 51.74,25.07 51.74,24.61 52.58,23.77 54.63,23.77 54.79,23.93 54.79,26.14 55.32,26.67 v56.54,26.67 | v57.84,25.91 58.67,26.75 65.15,26.75 65.76,26.14 65.76,25.6 U2.18
OVRCUR4  (via drill 0.3)
  Top 0.152: v60.35,25.68 58.6,27.43 57.53,27.43 57.45,27.51 56.77,27.51 56.08,28.19 54.71,26.82 54.71,26.59 54.41,26.29 53.95,26.29 53.65,26.59 53.65,27.81 v53.57,27.89 | v50.9,27.28 50.75,27.43 49,27.43 v48.69,27.74
  Bottom 0.152: R36.2 38.94,15.09 37.8,16.23 37.8,17.53 43.1,22.83 44.81,22.83 U4.9 47.93,25.15 47.93,26.67 48.69,27.43 v48.69,27.74 | v60.35,25.68 60.81,26.14 61.95,26.14 63.48,24.61 68.5,24.61 68.96,25.07 68.96,25.53 U2.22 | v53.57,27.89 51.51,27.89 v50.9,27.28
PB2  (via drill 0.3)
  Top 0.152: BTN2.2 91.14,9.3 90.91,9.53 88.01,9.53 R14.2 87.94,9.6 87.94,10.44 85.19,13.18 75.36,13.18 v75.06,12.88 | v65.23,8.15 65.23,7.92 63.93,6.63 64.01,6.55 64.01,5.79 62.87,4.65 62.56,4.65 62.41,4.5 v62.26,4.65
  Bottom 0.152: v75.06,12.88 75.06,12.57 71.25,8.76 65.84,8.76 v65.23,8.15 | v62.26,4.65 56.92,4.65 56.69,4.88 51.59,4.88 50.29,6.17 SV2.17
PB3  (via drill 0.3)
  Top 0.152: BTN3.2 99.75,8.76 99.75,9.07 99.52,9.3 97.92,9.3 97.69,9.53 95.94,9.53 R16.2 95.94,9.45 95.78,9.3 95.78,8.46 95.56,8.23 94.79,8.23 89.15,2.59 85.34,2.59 83.36,0.61 73.23,0.61 v73,0.84 | v46.48,4.11 46.56,4.19 46.56,4.27 46.48,4.34 46.48,4.95 47.7,6.17 SV2.19
  Bottom 0.152: v46.48,4.11 46.48,3.43 49.07,0.84 v73,0.84
PRE_ANT
  Bottom 0.152: R26.2 107.52,17.28 C15.1 107.37,17.22 101.8,17.22 101.73,17.3 U1.60
PRE_GPS
  Bottom 0.152: TP2.TP 105,24.08 101.96,24.08 101.73,24.31 U1.53 | 105.08,24 TP2.TP | TP2.TP 106.27,22.83 C16.2 107.58,22.71 L1.2
PWRKEY
  Bottom 0.152: R17.2 46.86,11.51 46.86,11.2 46.1,10.44 46.1,9.22 48.08,7.24 50.67,7.24 51.82,6.1 51.82,5.72 52.35,5.18 67.06,5.18 SV2.3
PWRON1
  Bottom 0.152: U2.9 63.48,18.52 55.47,18.52 55.24,18.29 54.79,18.29 54.25,18.82 54.25,20.35 U4.3
PWRON2
  Bottom 0.152: U2.13 63.48,21.79 57.84,21.79 57.07,22.56 54.25,22.56 53.03,21.34 53.03,20.42 U4.4
PWRON3
  Bottom 0.152: U2.17 64.92,25.6 62.94,25.6 62.1,26.44 60.35,26.44 56.77,22.86 51.21,22.86 49.23,20.88 49.23,20.42 U4.7
PWRON4  (via drill 0.3)
  Top 0.152: v75.06,25.15 75.84,24.36 75.84,20.93 75.89,20.88 75.89,18.31 72.72,15.14 62,15.14 59.51,12.65 59.05,12.65 v58.14,13.56
  Bottom 0.152: v75.06,25.15 75.06,25.45 73.15,27.36 69.42,27.36 68.2,26.14 68.2,25.6 U2.21 | v58.14,13.56 48.39,13.56 47.62,14.33 47.32,14.33 47.17,14.48 47.17,17.37 48.16,18.36 48.16,20.12 47.93,20.35 U4.8
REGULATED  (via drill 0.3)
  Top 0.152: v33.33,15.6 33.86,15.6 35.74,13.72 v35.74,13.03 37.19,11.58 v37.19,10.97 | C5.1 95.33,26.52 v96.62,26.52 97.84,26.52 C3.1 | v42.82,32.77 42.9,32.84 v47.62,32.84
  Bottom 0.152: v35.74,13.03 38.56,13.03 40.01,11.58 40.62,11.58 R6.2 | v33.33,15.6 32.31,15.6 POWER_SUPPLY.4 31.68,15.64 30.61,16.71 30.61,21.08 31.52,21.99 32.81,21.99 38.63,27.81 38.63,29.34 39.7,30.4 40.54,30.4 41.6,31.47 41.6,31.85 42.52,32.77 v42.82,32.77 | v37.19,10.97 37.19,10.9 37.57,10.52 39.17,10.52 39.32,10.36 43.36,10.36 43.89,9.83 44.65,9.83 R5.2 | R39.2 105.92,19.2 104.55,20.57 TP5.TP 104.47,20.57 101.88,20.57 101.73,20.42 U1.57 101.73,20.5 101.73,21.34 U1.56 101.73,21.41 101.73,22.33 U1.55 101.65,22.4 101.19,22.4 97.12,26.48 | v96.62,26.52 97.08,26.52 97.12,26.48 | v47.62,32.84 48.92,32.84 49.15,33.07 50.44,33.07 50.9,32.61 56.69,32.61 57.15,33.07 82.98,33.07 83.44,33.53 95.02,33.53 98.3,30.25 98.3,27.66 97.12,26.48
RESET
  Bottom 0.152: C17.1 67.36,12.65 67.36,13.11 66.86,13.6 68.2,14.94 68.2,16.99 U2.4 67.86,16.73 67.86,16.27 67.51,15.93 61.14,15.93 JP4.1 | C17.1 64.92,10.21 64.39,10.21 R38.2 | C17.1
RXD  (via drill 0.35)
  Top 0.152: U3.4 75.97,8.53 75.97,9.98 77.27,11.28 82.83,11.28 84.94,9.17 v84.94,8.28
  Bottom 0.152: U1.10 88.7,5.41 88.7,5.87 85.65,8.92 85.57,8.92 v84.94,8.28
SIM_DATA  (via drill 0.3)
  Top 0.152: v89,16.61 90.07,16.61 SIMCARD.C7 | v84.96,23.93 84.89,24 84.89,24.99 CR2.4 | v80.31,22.86 82.37,20.8 v82.53,20.8
  Bottom 0.152: v89,16.61 89,20.04 86.83,22.21 | 86.83,22.21 85.11,23.93 v84.96,23.93 | v80.31,22.86 79.86,22.4 77.72,22.4 U1.31 77.65,22.4 77.19,22.4 76.58,23.01 74.62,23.01 JP10.1 | v82.53,20.8 85.04,20.8 85.5,21.26 85.88,21.26 86.83,22.21
SIMC_ADC
  Bottom 0.152: U1.25 77.39,16.03 JP9.1
SIMC_I2C_SCL
  Bottom 0.152: U1.38 84.72,30.93 84.48,31.17 79.25,31.17 TP7.TP
SIMC_I2C_SDA
  Bottom 0.152: U1.37 83.72,30.58 82.95,30.58 82.94,30.59 80.77,30.59 79.96,29.78 77.24,29.78 76.77,30.25 TP8.TP
SLEEP  (via drill 0.3)
  Top 0.152: v68.89,5.18 69.42,4.65 69.57,4.65 70.56,3.66 SV2.2
  Bottom 0.152: v68.89,5.18 69.11,5.41 69.11,6.55 68.43,7.24 65.38,7.24 63.32,9.3 63.25,9.3 62.48,10.06 T2.1
SUSPEND
  Bottom 0.152: JP3.1 72.92,17.64 U2.32
TXD  (via drill 0.3)
  Top 0.152: v74.22,8.38 73.84,8.38 73.76,8.46 73.23,8.46 U3.5 | v72.85,2.06 v72.08,2.82 | v85.8,3.12 v86.56,3.89
  Bottom 0.152: v74.22,8.38 74.22,5.11 72.08,2.97 v72.08,2.82 | v72.85,2.06 72.85,1.75 73.84,0.76 77.65,0.76 78.33,1.45 82.83,1.45 84.51,3.12 v85.8,3.12 | v86.56,3.89 88.7,3.89 89.69,4.88 89.69,5.33 U1.9
USB1_D+
  Top 0.152: J1.3 8.25,15.82 6.73,14.3 6.73,13.2 4.85,11.33 4.85,8.93 3.99,8.07 3.99,6.24 5.62,4.61 6.9,4.61 JP6.2
  Bottom 0.152: 12.69,19.77 11.89,20.57 R24.2 | 12.69,19.77 12.72,19.74 14.1,19.74 14.63,20.27 15.85,20.27 R20.1 | J1.3 8.31,16.15 11.28,16.15 12.65,17.53 12.65,19.74 12.69,19.77
USB1_D-
  Top 0.152: J1.2 8.25,17.92 9.62,16.55 9.62,15.64 8.77,14.79 7.68,14.79 7.13,14.23 7.13,13.15 7.8,12.49 9.39,12.49 10.5,11.38 10.5,5.98 9.3,4.78 JP6.1
  Bottom 0.152: R19.1 15.93,23.7 14.55,25.07 14.02,25.07 12.5,23.55 12.04,23.55 R23.2 11.96,23.47 11.96,22.17 8.38,18.59 8.38,18.29 8.31,18.21 J1.2
USB2_D+  (via drill 0.3)
  Top 0.152: v12.27,16.38 11.73,16.92 v11.28,16.92 | JP2.2 8.87,32.97 10.44,31.4 10.44,28.95 6.47,24.98 6.47,17.77 5.53,16.83 J1.7
  Bottom 0.152: 10.71,17.49 10.36,17.15 6.48,17.15 5.53,16.2 J1.7 | 10.71,17.49 11.2,17.98 11.73,17.98 R13.2 | v12.27,16.38 12.72,16.84 15.85,16.84 R21.2 | 10.71,17.49 v11.28,16.92
USB2_D-
  Top 0.152: J1.6 4.59,19.1 4.59,21.04 4.81,21.26 4.81,25.65 4.24,26.21 4.24,28.12 6.55,30.43 JP2.1
  Bottom 0.152: J1.6 5.49,18.14 4.27,18.14 2.44,16.31 2.44,15.7 3.5,14.63 10.21,14.63 10.67,14.17 13.79,14.17 14.67,15.05 | 14.67,15.05 14.17,15.54 14.17,16 14.02,16.15 12.8,16.15 11.96,15.32 11.73,15.32 R15.2 | 14.67,15.05 15.77,13.94 15.77,13.49 R22.2
USB_VBUS  (via drill 0.3)
  Top 0.152: v82.91,23.24 83.36,23.7 84.28,23.7 v84.81,23.16 | v83.74,27.66 v84.51,26.9
  Bottom 0.152: v82.91,23.24 82.91,22.63 81.99,21.72 81.99,19.13 78.26,15.39 77.72,15.39 U1.24 | v84.81,23.16 84.81,23.32 84.43,23.7 84.43,26.82 v84.51,26.9 | v83.74,27.66 72.8,27.66 71.58,28.88 71.58,29.29 70.47,30.4 66.52,30.4 65.53,31.39 SV1.5 65.46,31.47 63.02,31.47 SV1.7
XTAL1  (via drill 0.3)
  Top 0.152: 73.5,21.07 73.08,21.49 73,21.49 72.69,21.79 72.69,22.17 71.78,23.09 70.33,23.09 CR1.1 | 73.5,21.07 73.99,20.57 74.68,20.57 C12.1 | v73.46,21.03 73.5,21.07
  Bottom 0.152: v73.46,21.03 72.62,20.19 72.08,20.19 U2.30
XTAL2  (via drill 0.3)
  Top 0.152: v58.29,17.45 58.83,16.92 66.22,16.92 70.03,20.73 v70.79,20.73
  Bottom 0.152: v58.29,17.45 57.61,16.76 56.84,16.76 R9.2 | v70.79,20.73 71.86,20.73 72.01,20.88 U2.29

## Text on the board
tPlace: Janak Patel | Liza Lance | Arthur Brazzle | Alex Minser | NCSU ECE Senior Design 2020